# Altium PCB max.PcbDoc
Units mil, origin at the board's own origin, x right, y up, seen from the top; angles counter-clockwise.
Board outline 2401.57 x 1653.54 mil, 2 copper layers (Top Layer, Bottom Layer); 13 components, 20 nets, 107 pads, 27 vias.
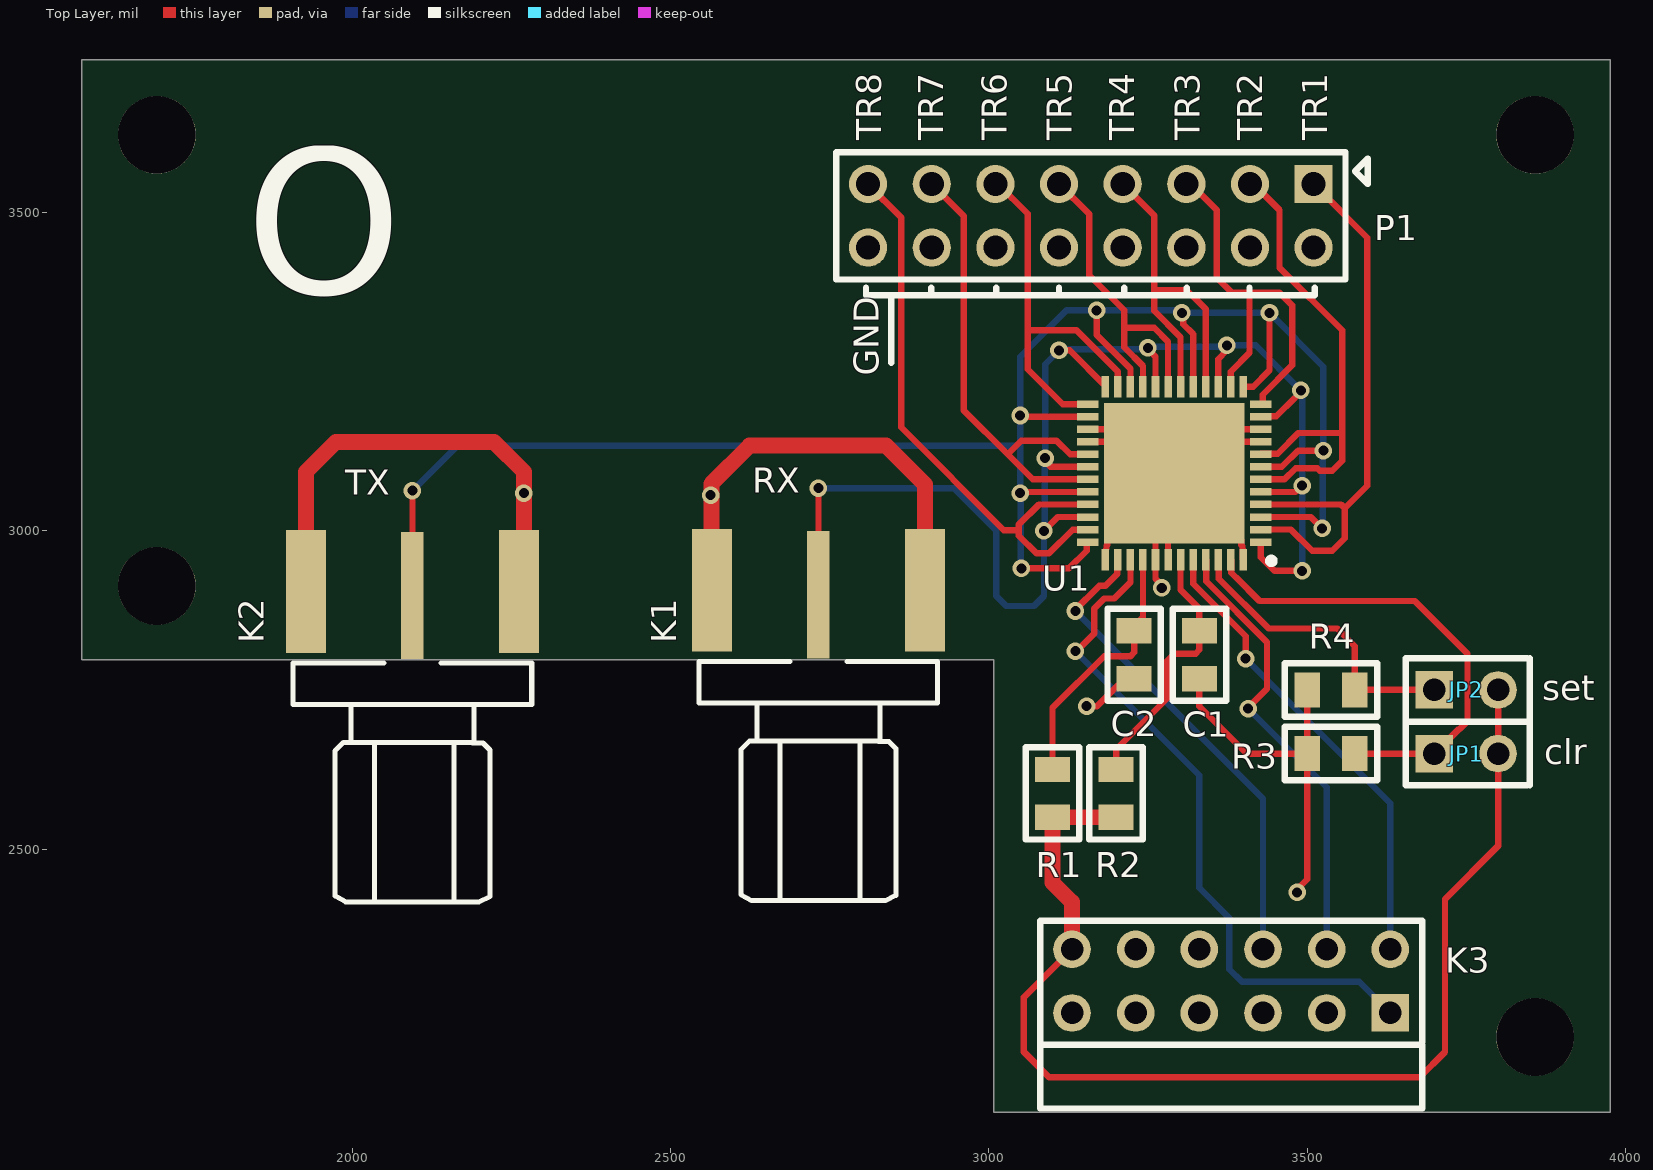
[diagram p0: Top Layer view]
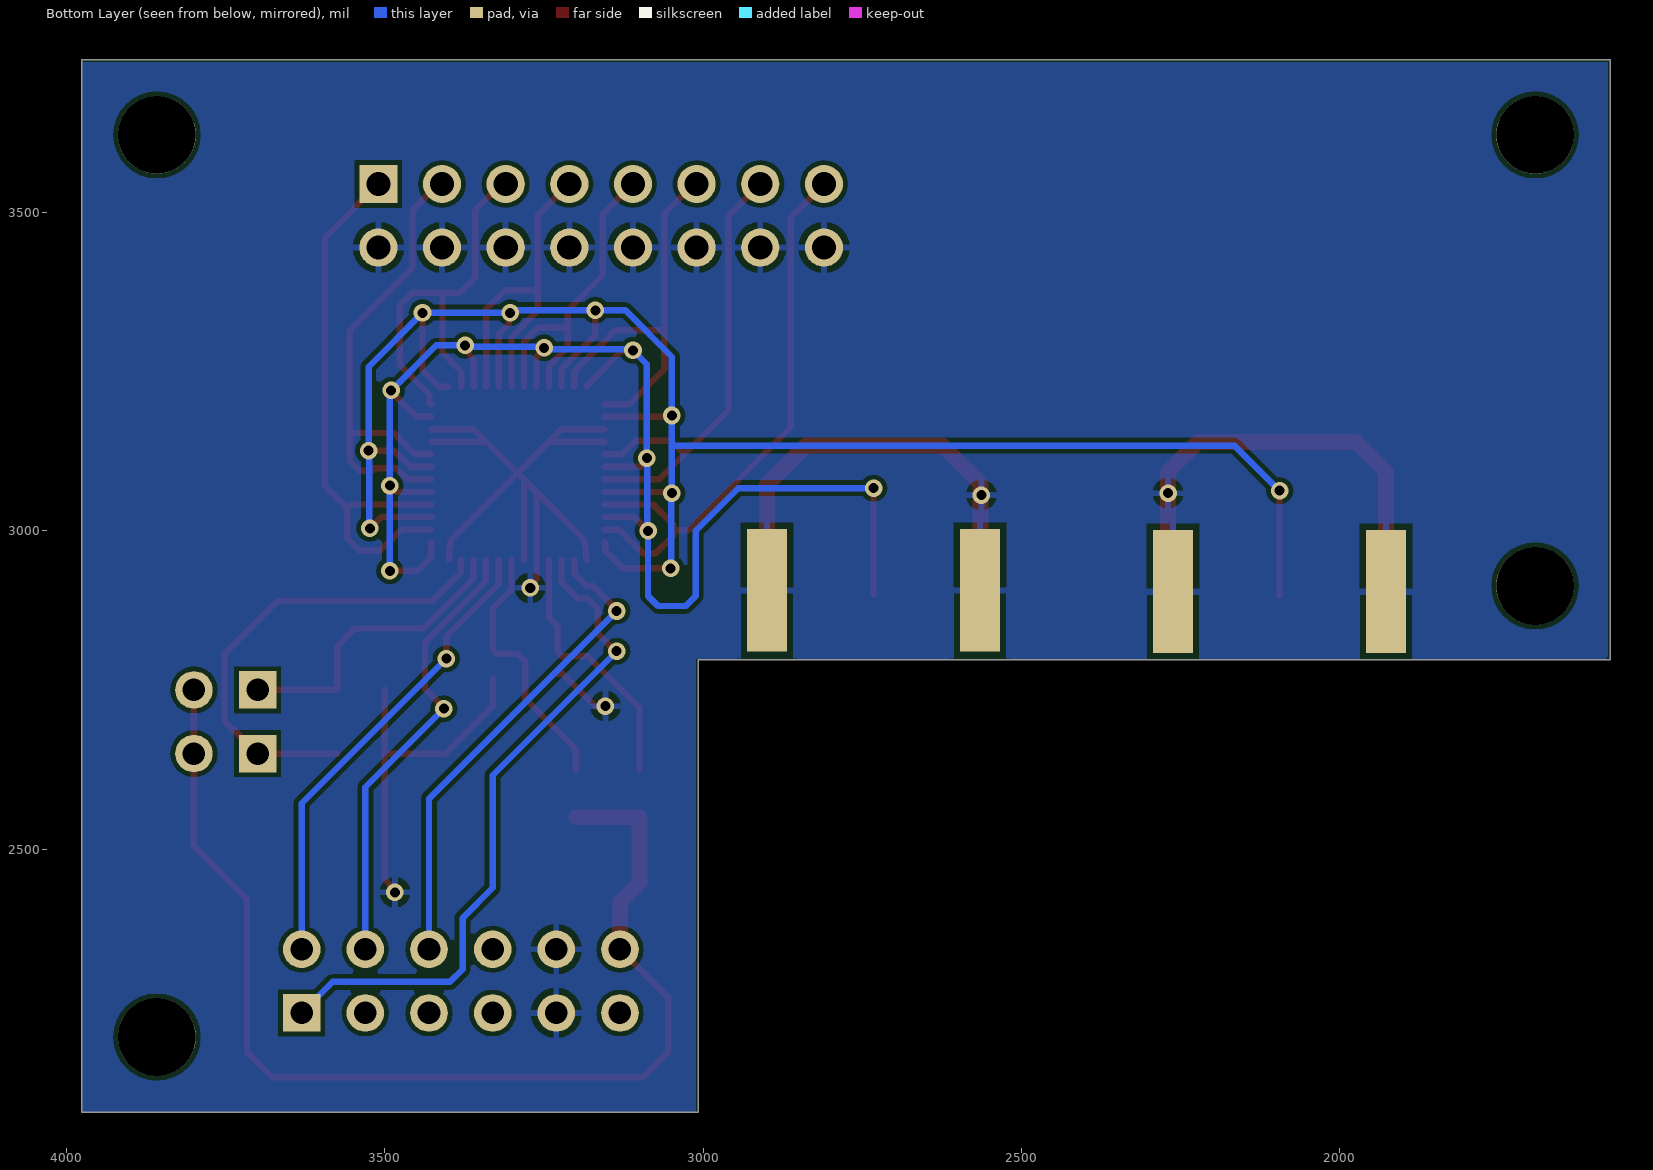
[diagram p1: Bottom Layer view, seen from below]

## Layer stack, top to bottom
Top Solder: solder mask 0.4, Solder Resist, Dk 3.5
Top Layer: signal copper 1.4
Dielectric 1: dielectric 12.6, FR-4, Dk 4.8
Bottom Layer: signal copper 1.4
Bottom Solder: solder mask 0.4, Solder Resist, Dk 3.5

## Board outline
3008.02,2797.38 3008.02,2086.61 3976.38,2086.61 3976.38,3740.16 1574.8,3740.16 1574.8,2797.38

## Design rules (kind name [scope] priority, off if disabled: settings)
Clearance [All] p1: gap=7 ignorepadtopadclearanceinfootprint=TRUE
ComponentClearance [All] p1: gap=0 collisioncheckmode=3 verticalgap=0 showdistances=FALSE
HoleSize [All] p1: absolutevalues=TRUE maxlimit=150 minlimit=1 maxpercent=80.000 minpercent=20.000
MinimumSolderMaskSliver [All] p1: minsoldermaskwidth=0
PolygonConnect [All] p1: connectstyle=Relief reliefconductorwidth=10 reliefentries=4 polygonreliefangle="90 Angle" airgapwidth=10
RoutingVias [All] p1: holewidth=11.81 width=27.56 viastyle="Through Hole" minholewidth=11.81 minwidth=27.56 maxholewidth=11.81 maxwidth=27.56
SilkToSilkClearance [All] p1: silktosilkclearance=6
SilkToSolderMaskClearance [IsPad] p1: minsilkscreentomaskgap=4 clearancetoexposedcopper=TRUE
SolderMaskExpansion [All] p1: expansion=4 istentingtop=FALSE
Width [All] p1: maxlimit=100 minlimit=10 preferedwidth=10
25 further rules are at their usual default settings.

## Components (designator, comment, footprint, x,y, rotation, side; value= is the part's Value field where it differs from the comment)
C1 "cap0805" SM0805 3330.71,2842.72 r270 top value=0.1
C2 "cap0805" SM0805 3228.35,2842.72 r270 top value=0.1
JP1 "JUMPER2" JUMPER2 3700,2650 r90 top
JP2 "JUMPER2" JUMPER2 3700,2750 r90 top
K1 "SMA_MALE_with_NUT" AMPHENOL_MALE 2732.28,2844.49 r90 top
K2 "SMA_MALE_with_NUT" AMPHENOL_MALE 2094.49,2842.52 r90 top
K3 "PMOD_6x2_ra_male_mirrored" PMOD_6x2_RA_MALE_MIRRORED 3130.71,2342.52 r0 top
P1 "2x8, 2.54mm vertical" "2x8 pin 2.54mm" 3510.24,3544.88 r270 top
R1 "res0805_EU" SM0805 3100,2625 r270 top value=10
R2 "res0805_EU" SM0805 3200,2625 r270 top value=10
R3 "res0805_EU" SM0805 3575,2650 r180 top value=10k
R4 "res0805_EU" SM0805 3575,2750 r180 top value=10k
U1 "MAX14866UTM+" QFN50P700X700X80-49N 3291.34,3090.55 r180 top

## Footprints (in the part's own frame and the unit in brackets; to place one, negate y for a bottom-side part, rotate by r counter-clockwise, add the part's x,y. Pads: shape width x height; smd on the part's side, far side on the other; paste and mask are expansions set on the pad)
"2x8 pin 2.54mm" [mil] "2x8 pin 2.54mm"
  rect 60x60 hole 38: 1(0,0)
  round 60 hole 38: 2(100,0) 3(0,-100) 4(100,-100) 5(0,-200) 6(100,-200) 7(0,-300) 8(100,-300) 9(0,-400) 10(100,-400) 11(0,-500) 12(100,-500) 13(0,-600) 14(100,-600) 15(0,-700) 16(100,-700)
  silkscreen extent -50,-750 150,85
AMPHENOL_MALE [mm]
  rect 5.1x0.9 smd: 1(1.397,0)
  rect 4.9x1.6 smd: 2(1.575,4.25) 2(1.575,-4.25)
  rect 4.9x1.6 smd far side: 2(1.575,4.25) 2(1.575,-4.25)
  silkscreen extent -10.81,-4.76 -1.28,4.76, body extent -10.8,-4.76 3.48,4.76, height 4.08
JUMPER2 [mm]
  rect 1.5x1.5 hole 0.9: 1(0,0)
  round 1.5 hole 0.9: 2(0,-2.54)
  silkscreen extent -1.27,-3.81 1.27,1.14
PMOD_6x2_RA_MALE_MIRRORED [mm] "2.54 mm right angle 6x2 pins"
  rect 1.5x1.5 hole 0.9: 1(12.7,-2.54)
  round 1.5 hole 0.9: 2(10.16,-2.54) 3(7.62,-2.54) 4(5.08,-2.54) 5(2.54,-2.54) 6(0,-2.54) 7(12.7,0) 8(10.16,0) 9(7.62,0) 10(5.08,0) 11(2.54,0) 12(0,0)
  silkscreen extent -1.27,-6.35 13.97,1.14
QFN50P700X700X80-49N [mm]
  rect 0.85x0.3 smd: 1(-3.45,2.75) 2(-3.45,2.25) 3(-3.45,1.75) 4(-3.45,1.25) 5(-3.45,0.75) 6(-3.45,0.25) 7(-3.45,-0.25) 8(-3.45,-0.75) 9(-3.45,-1.25) 10(-3.45,-1.75) 11(-3.45,-2.25) 12(-3.45,-2.75) 25(3.45,-2.75) 26(3.45,-2.25) 27(3.45,-1.75) 28(3.45,-1.25) 29(3.45,-0.75) 30(3.45,-0.25) 31(3.45,0.25) 32(3.45,0.75) 33(3.45,1.25) 34(3.45,1.75) 35(3.45,2.25) 36(3.45,2.75)
  rect 0.3x0.85 smd: 13(-2.75,-3.45) 14(-2.25,-3.45) 15(-1.75,-3.45) 16(-1.25,-3.45) 17(-0.75,-3.45) 18(-0.25,-3.45) 19(0.25,-3.45) 20(0.75,-3.45) 21(1.25,-3.45) 22(1.75,-3.45) 23(2.25,-3.45) 24(2.75,-3.45) 37(2.75,3.45) 38(2.25,3.45) 39(1.75,3.45) 40(1.25,3.45) 41(0.75,3.45) 42(0.25,3.45) 43(-0.25,3.45) 44(-0.75,3.45) 45(-1.25,3.45) 46(-1.75,3.45) 47(-2.25,3.45) 48(-2.75,3.45)
  rect 5.6x5.6 smd: 49(0,0)
  silkscreen extent -4,3.38 -3.75,3.62, body extent -3.55,-3.55 3.55,3.55, height 0.8
SM0805 [mil]
  rect 40x55 smd: 1(0,0) 2(75,0)
  silkscreen extent -35,-42 110,42

## Part data
C1 C2: "Capacitor", LatestRevisionDate=17-Jul-2002, LatestRevisionNote="Re-released for DXP Platform.", PackageDescription="Radial Cap, Thru-Hole; 2 Leads; 0.3 in Pin Spacing", PackageReference=RAD-0.3, Published=8-Jun-2000, Publisher="Altium Limited"
K3: "PMOD_6x2_right_angle"
P1: library part "2x8, 2.54mm, vertical", "Header, 16-Pin", LatestRevisionDate=17-Jul-2002, LatestRevisionNote="Re-released for DXP Platform.", Publisher="Altium Limited"
R1 R2 R3 R4: "Resistor", LatestRevisionDate=29-May-2009, LatestRevisionNote="IPC-7351 Footprint Added.", PackageDescription="Chip Resistor", PackageReference=J1-0603, Published=8-Jun-2000, Publisher="Altium Limited"
U1: "Integrated Circuit", Manufacturer_Name="Maxim Integrated", Mouser Part Number=700-MAX14866UTM+, Datasheet Link=https://www.mouser.com/datasheet/2/256/MAX14866-1154497.pdf, Height=0.8mm, Manufacturer_Part_Number=MAX14866UTM+, Mouser Price/Stock=https://www.mouser.co.uk/ProductDetail/Maxim-Integrated/MAX14866UTM%2b?qs=1mbolxNpo8f6nC88ZZmOdg%3D%3D

## Free pads (board coordinates)
  round 122.05 hole 122.05 unplated: 0(1692.91,2913.39) 0(1692.91,3622.05) 0(3858.27,2204.72) 0(3858.27,3622.05)

## Via types
v1: diameter 27.56, hole 15.75, Top Layer to Bottom Layer, 27 vias

## Nets (pads, with @x,y where several pads share a name; then routed paths per layer and width w, separated by ;. In a path a pad name is that pad's centre, name@x,y a point inside that pad or via, vN(x,y) a via of type N, cw(c..) or ccw(c..) an arc to the next point about the centre after c; other vN are vias at no path point)
+5V: JP1.2 JP2.2 K3.12 R1.2 R2.2 | length 1810.4
  Top Layer w10: K3.12 3055.12,2266.93 3055.12,2181.1 3094.49,2141.73 3677.17,2141.73 3716.54,2181.1 3716.54,2421.26 3800,2504.72 JP1.2 JP2.2
  Top Layer w25: K3.12 3130.71,2416.54 3100,2447.24 R1.2 R2.2
clk: K3.8 U1.45 | length 716.2
  Top Layer w10: U1.45 3341.46,2953.82 3341.46,2920.48 3437.01,2824.93 3437.01,2751.97 v1@3405.51,2720.47
  Bottom Layer w10: v1(3407.48,2720.47) 3530.71,2597.24 K3.8
clr: JP1.1 R3.1 U1.47 | length 749.2
  Top Layer w10: U1.47 3380.83,2953.82 3380.83,2933.9 3388.73,2925.99 3388.97,2925.99 3425.2,2889.76 3669.29,2889.76 3751.97,2807.09 3751.97,2700.79 3739.85,2688.67 3738.67,2688.67 JP1.1 3578.94,2650 R3.1
din: K3.7 U1.44 | length 734.5
  Top Layer w10: U1.44 3320.87,2917.03 3403.54,2834.35 3403.54,2807.32 3403.31,2807.09 v1@3401.57,2807.09
  Bottom Layer w10: v1(3403.54,2799.21) 3630.71,2572.05 K3.7
dout: K3.1 U1.39 | length 1069.4
  Top Layer w10: v1@3137.8,2811.02 3165.35,2838.58 3165.35,2877.95 3181.1,2893.7 3196.85,2893.7 3222.44,2919.29 U1.39
  Bottom Layer w10: v1(3135.83,2811.02) 3330.71,2616.14 3330.71,2438.98 3377.95,2391.73 3377.95,2311.02 3397.64,2291.34 3581.89,2291.34 K3.1
GND: C1.2 C2.2 K1.2 K2.2 K3.5 K3.11 P1.2 P1.4 P1.6 P1.8 P1.10 P1.12 P1.14 P1.16 R3.2 R4.2 U1.9 U1.10 U1.27 U1.28 U1.37 U1.41 U1.42 U1.48 U1.49 | length 3288.5
  Top Layer w10: v1(3153.54,2724.41) 3169.86,2724.41 3220.85,2775.39 C2.2@3228.35,2775.39 ; U1.28 U1.49@3242.13,3139.76 ; U1.27 3222.44,3159.45 U1.49@3242.13,3139.76 ; U1.37 3183.98,2955.63 3183.98,2971.14 3184.85,2972.01 3184.85,2976.43 3186.1,2977.68 3186.1,2985.32 U1.49@3261.81,3061.02 ; v1(3271.65,2910.43) 3271.65,2914.56 3261.81,2924.4 U1.41 U1.49@3261.81,3061.02 ; U1.42 U1.49@3281.5,3080.71 ; C1.2 3330.71,2724.41 3405.12,2650 R3.2 ; U1.48 3398.7,2955.63 3398.7,2971.14 3398.43,2971.41 3398.43,2975.82 3396.57,2977.68 3396.57,2985.32 U1.49 ; U1.9 U1.49@3340.55,3139.76 ; U1.10 3360.24,3159.45 U1.49@3340.55,3139.76 ; v1(3484.25,2432.09) 3484.25,2436.84 3492.14,2444.73 3492.14,2444.9 3500,2452.76 R3.2 ; R4.2 R3.2 ; U1.49@3242.13,3139.76 U1.49 ; U1.49@3261.81,3061.02 U1.49@3281.5,3080.71 ; U1.49@3281.5,3080.71 U1.49 ; U1.49 U1.49@3340.55,3139.76
  Top Layer w25: K2.2@1927.17,2904.53 1927.17,3092.52 1974.41,3139.76 2222.44,3139.76 2269.68,3092.52 2269.68,2912.4 K2.2@2261.81,2904.53 ; K1.2@2564.96,2906.5 2563.98,2907.48 2563.98,3056.1 2563.98,3073.82 2624.02,3133.86 2838.58,3133.86 2899.61,3072.83 K1.2@2899.61,2906.5
  other v1: 2562.99,3056.1 2269.68,3059.06
le: K3.9 U1.38 | length 768.7
  Top Layer w10: v1@3133.86,2874.02 3173.23,2913.39 3183.07,2913.39 3201.85,2932.17 3201.85,2953.82 U1.38
  Bottom Layer w10: v1(3135.83,2874.02) 3430.71,2579.13 K3.9
NetC1_1: C1.1 R2.1 U1.43 | length 415.7
  Top Layer w10: R2.1 3200,2656.69 3279.53,2736.22 3279.53,2795.28 3291.34,2807.09 3324.85,2807.09 3330.71,2812.94 C1.1 3330.71,2877.95 3301.18,2907.48 U1.43
NetC2_1: C2.1 R1.1 U1.40 | length 412.8
  Top Layer w10: R1.1 3100,2722.05 3181.1,2803.15 3222.49,2803.15 3228.35,2809.01 3228.35,2850.39 3242.13,2864.17 U1.40
NetK1_1: K1.1 U1.1 U1.5 U1.11 U1.15 U1.20 U1.24 U1.30 U1.34 | length 2369.1
  Top Layer w10: K1.1 v1(2732.28,3066.93) ; v1(3086.61,3000) 3108.27,3021.65 U1.34 ; v1@3086.61,3110.24 3096.46,3100.39 U1.30 ; v1(3110.24,3283.46) 3127.05,3283.46 3183.07,3227.44 U1.24 ; v1@3251.97,3283.46 3261.81,3273.62 U1.20 ; U1.15 3360.24,3269.69 3374.02,3283.46 v1(3374.02,3291.34) ; U1.1 3427.17,2958.66 3448.82,2937.01 v1(3492.13,2937.01) ; U1.5 3481.47,3061.02 3491.31,3070.87 v1(3492.13,3070.87) ; U1.11 3428.07,3180.04 3451.69,3180.04 3480.32,3208.66
  Bottom Layer w10: v1(2732.28,3066.93) 2944.88,3066.93 3011.81,3000 3011.81,2897.64 3027.56,2881.89 3070.87,2881.89 3086.61,2897.64 v1(3086.61,3000) 3087.6,3000.98 3087.6,3113.19 v1(3088.58,3114.17) 3088.58,3261.81 v1(3110.24,3283.46) 3112.2,3285.43 3248.03,3285.43 v1(3250,3287.4) 3251.97,3289.37 3372.05,3289.37 v1(3374.02,3291.34) 3419.29,3291.34 v1(3490.16,3220.47) 3492.13,3218.5 v1(3492.13,3070.87) 3492.13,2981.71 v1(3492.13,2937.01)
NetK2_1: K2.1 U1.3 U1.7 U1.13 U1.17 U1.22 U1.26 U1.32 U1.36 | length 3242.2
  Top Layer w10: K2.1 v1(2094.49,3062.99) ; v1@3047.24,3059.06 3049.21,3061.02 U1.32 ; v1(3051.18,2940.94) 3125.98,2940.94 3153.54,2968.5 3153.54,2981.38 3154.45,2982.28 U1.36 ; v1@3051.18,3181.1 3053.15,3179.13 U1.26 ; v1(3169.29,3346.46) 3169.29,3307.61 3222.44,3254.46 U1.22 ; v1@3299.21,3338.58 3301.45,3338.58 3305.63,3334.41 3305.63,3324.3 3320.87,3309.05 U1.17 ; U1.13 3415.35,3226.38 3440.94,3251.97 v1(3440.94,3342.52) ; U1.3 3505.91,3021.65 v1(3523.62,3003.94) ; U1.7 3427.28,3100.51 3460.32,3100.51 3485.8,3125.98 v1@3523.62,3125.98
  Bottom Layer w10: v1(2094.49,3062.99) 2165.35,3133.86 3049.21,3133.86 ; v1(3051.18,2940.94) 3050.2,2941.93 3050.2,3058.07 v1(3049.21,3059.06) 3049.21,3133.86 ; v1(3523.62,3003.94) 3524.61,3004.92 3524.61,3125 v1(3525.59,3125.98) 3525.59,3257.87 v1(3440.94,3342.52) v1(3303.15,3342.52) 3298.4,3342.52 3294.46,3346.46 v1(3169.29,3346.46) 3122.05,3346.46 3049.21,3273.62 v1(3049.21,3181.1) 3049.21,3133.86
set: JP2.1 R4.1 U1.46 | length 481.8
  Top Layer w10: U1.46 3361.14,2953.82 3361.14,2924.84 3439.52,2846.46 3547.24,2846.46 3575,2818.7 R4.1 JP2.1
tr1: P1.1 U1.2 U1.4 | length 894.5
  Top Layer w10: U1.2 3474.41,3001.97 3507.87,2968.5 3539.37,2968.5 3559.06,2988.19 3559.06,3035.43 ; U1.4 3553.15,3041.34 3559.06,3035.43 ; P1.1 3594.49,3460.63 3594.49,3070.87 3559.06,3035.43
tr2: P1.3 U1.6 U1.8 | length 783.1
  Top Layer w10: P1.3 3415.75,3544.88 3456.69,3503.94 3456.69,3413.39 3555.12,3314.96 3555.12,3153.54 ; U1.6 3464.57,3080.71 3482.28,3098.43 3515.75,3098.43 3519.68,3094.49 3539.37,3094.49 3555.12,3110.24 3555.12,3153.54 ; U1.8 3428.07,3120.98 3453.66,3120.98 3486.22,3153.54 3555.12,3153.54
tr3: P1.5 U1.12 U1.14 | length 644.5
  Top Layer w10: P1.5 3317.32,3544.88 3358.27,3503.94 3358.27,3397.64 3381.89,3374.02 3409.45,3374.02 ; U1.14 3380.04,3226.49 3380.04,3250.11 3409.45,3279.53 3409.45,3374.02 ; U1.12 3429.5,3198.82 3430.4,3199.72 3430.4,3213.87 3476.38,3259.84 3476.38,3354.33 3456.69,3374.02 3409.45,3374.02
tr4: P1.7 U1.16 U1.18 | length 572.8
  Top Layer w10: P1.7 3259.84,3495.28 3259.84,3381.89 ; U1.18 3301.18,3304.13 3259.84,3345.47 3259.84,3377.95 3259.84,3381.89 ; U1.16 3340.55,3348.43 3311.02,3377.95 3263.78,3377.95 3259.84,3381.89
tr5: P1.9 U1.19 U1.21 | length 521.9
  Top Layer w10: P1.9 3157.48,3497.64 3157.48,3401.57 3212.6,3346.46 3212.6,3318.9 ; U1.21 3242.13,3258.82 3212.6,3288.35 3212.6,3318.9 ; U1.19 3281.5,3297.24 3259.84,3318.9 3212.6,3318.9
tr6: P1.11 U1.23 U1.25 | length 623.9
  Top Layer w10: P1.11 3014.17,3544.88 3061.02,3498.03 3061.02,3314.96 ; U1.25 3116.14,3198.82 3061.02,3253.94 3061.02,3314.96 ; U1.23 3202.43,3226.7 3202.43,3250.32 3137.8,3314.96 3061.02,3314.96
tr7: P1.13 U1.29 U1.31 | length 760.4
  Top Layer w10: P1.13 2960.63,3494.49 2960.63,3188.98 3029.53,3120.08 ; U1.31 3068.9,3080.71 3029.53,3120.08 ; U1.29 3127.95,3120.08 3106.3,3141.73 3051.18,3141.73 3029.53,3120.08
tr8: P1.15 U1.33 U1.35 | length 930.1
  Top Layer w10: P1.15 2810.24,3544.09 2862.2,3492.13 2862.2,3162.4 3023.62,3000.98 3047.24,3000.98 ; U1.35 3155.4,3001.85 3131.78,3001.85 3094.49,2964.57 3074.8,2964.57 3047.24,2992.13 3047.24,3000.98 ; U1.33 3078.74,3041.34 3047.24,3009.84 3047.24,3000.98
pads on no net: K3.2 K3.3 K3.4 K3.6 K3.10

## Polygon pours and split planes (outlines as drawn)
GND on Bottom Layer "GND_L02_P000" (solid, pour order 0): 1578.74,3736.22 1578.74,2803.15 1582.68,2799.21 3011.81,2799.21 3011.81,2086.61 3976.38,2086.61 3976.38,3736.22

## Silkscreen, mask and mechanical layers (free items; w line width, h text height)
Top Overlay:
  lines w10: 2807.09,3381.89 2807.09,3370.08 2846.46,3370.08 ; 2846.46,3263.78 2846.46,3370.08 ; 2909.45,3370.08 2909.45,3381.89 ; 3011.81,3370.08 3011.81,3381.89 ; 3110.24,3370.08 3110.24,3381.89 ; 3212.6,3370.08 3212.6,3381.89 ; 3311.02,3370.08 3311.02,3381.89 ; 3409.45,3370.08 3409.45,3381.89 ; 3511.81,3381.89 3511.81,3370.08 2846.46,3370.08
  text "TR8" at 2831.1,3613.78 h39.37 r90
  text "TR6" at 3027.95,3613.78 h39.37 r90
  text "TR5" at 3130.32,3613.78 h39.37 r90
  text "TR4" at 3228.74,3613.78 h39.37 r90
  text "TR3" at 3331.1,3613.78 h39.37 r90
  text "TR2" at 3429.53,3613.78 h39.37 r90
  text "TR1" at 3531.89,3613.78 h39.37 r90
  text "TR7" at 2928.47,3613.35 h39.37 r90
  text "O" at 1831.69,3260.83 h590.55
  text "GND" at 2827.17,3243.7 h39.37 r90
  text "RX" at 2628.54,3059.65 h39.37
  text "TX" at 1988.78,3056.69 h39.37
  text "set" at 3869.68,2733.86 h39.37
  text "clr" at 3872.64,2633.46 h39.37
Mechanical 1:
  lines w10: 1574.8,2795.28 3007.87,2795.28 3007.87,2086.61 3976.38,2086.61 3976.38,3740.16 1574.8,3740.16 1574.8,2795.28